# Altium PCB PCB.PcbDoc (part 1 of 2)
Units mil, origin at the board's own origin, x right, y up, seen from the top; angles counter-clockwise.
Board outline 2657.48 x 2755.91 mil, 2 copper layers (Top Layer, Bottom Layer), stack 62.2 mil thick; 84 components, 72 nets, 315 pads, 105 vias.
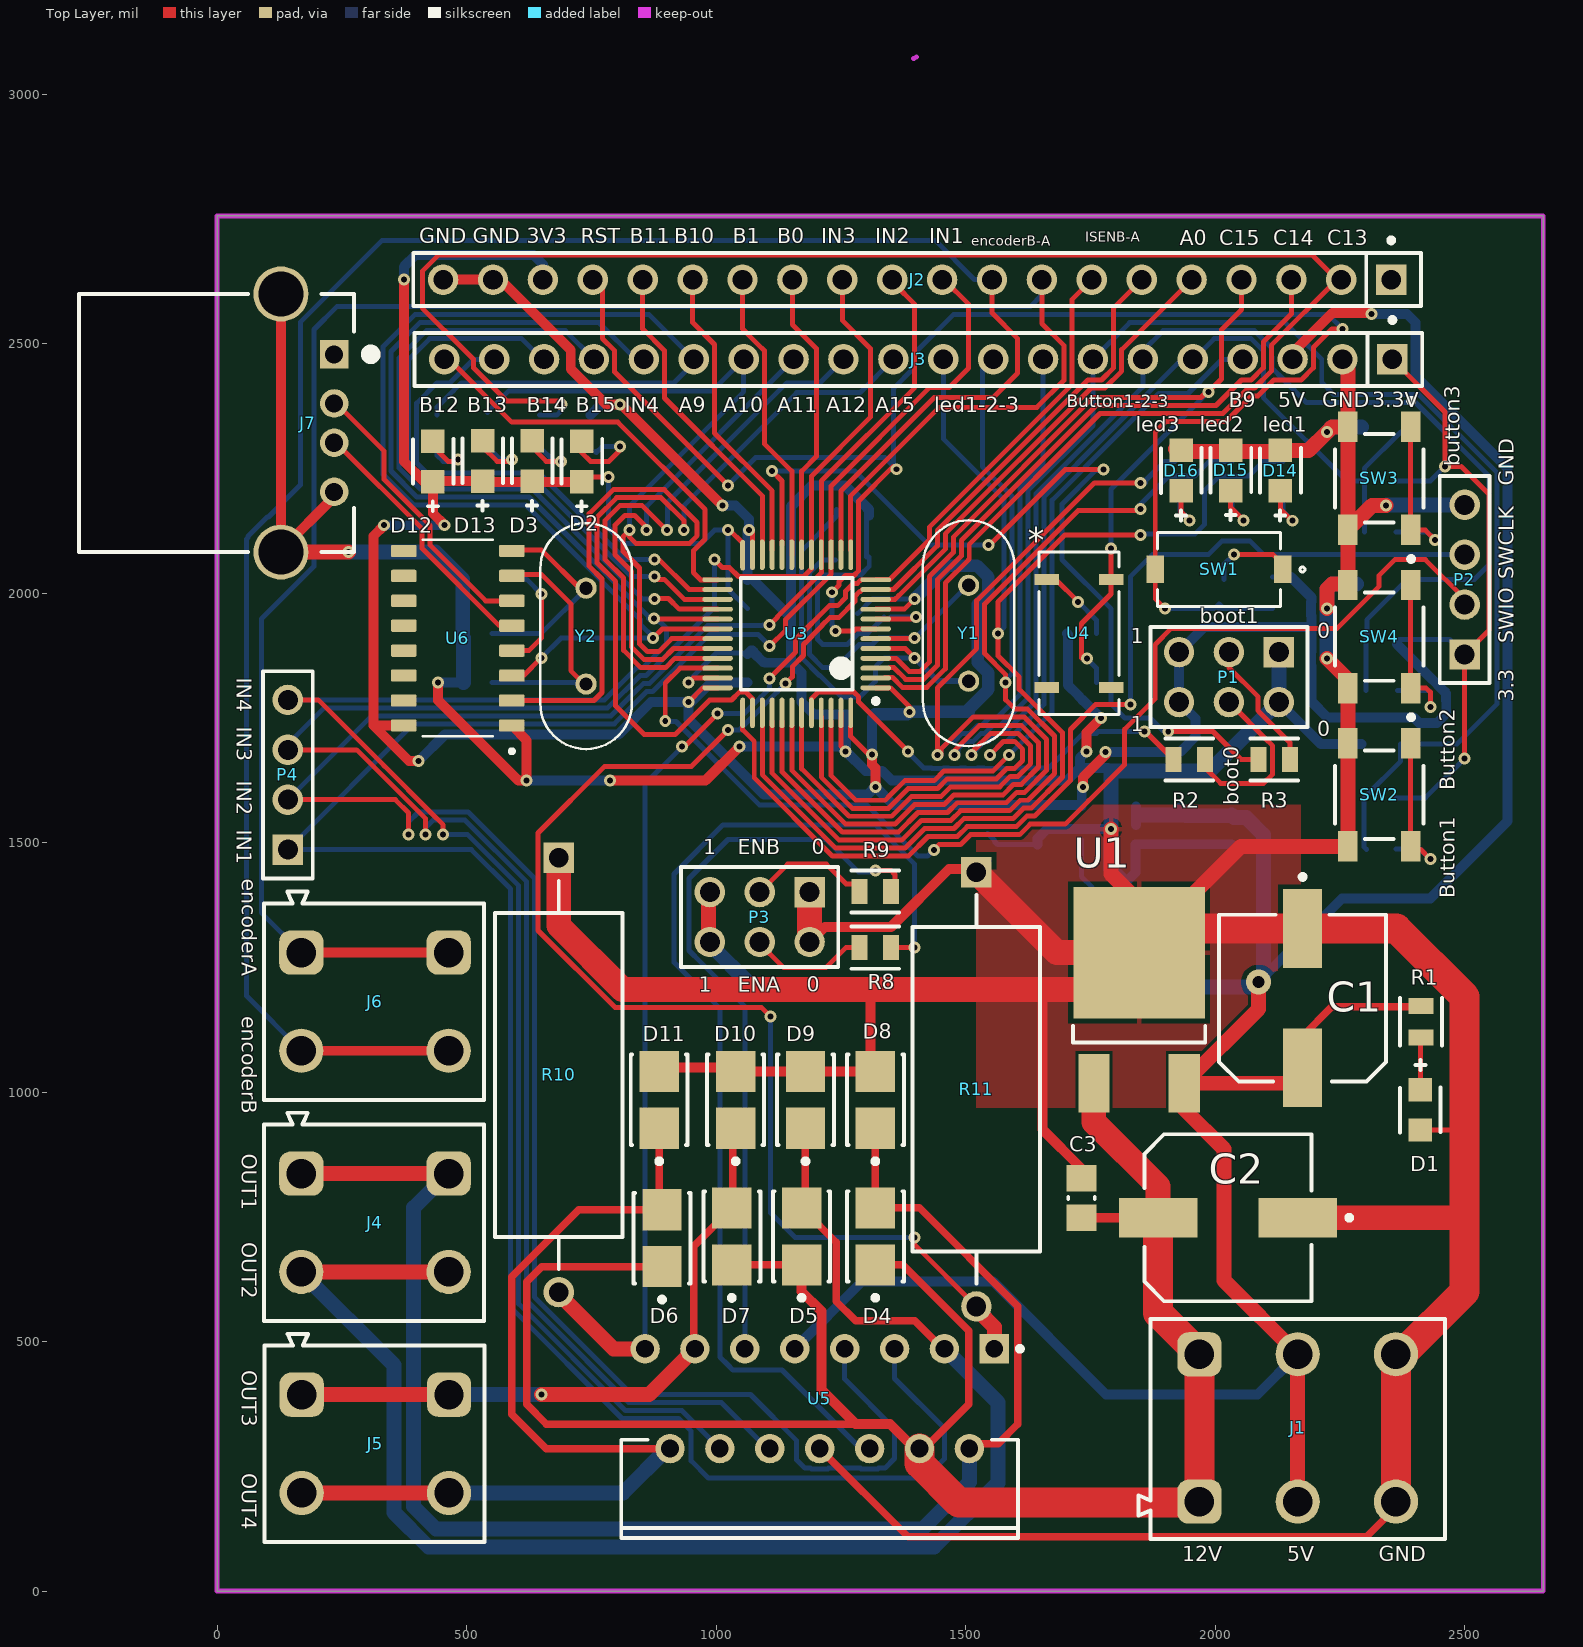
[diagram p0: Top Layer view]
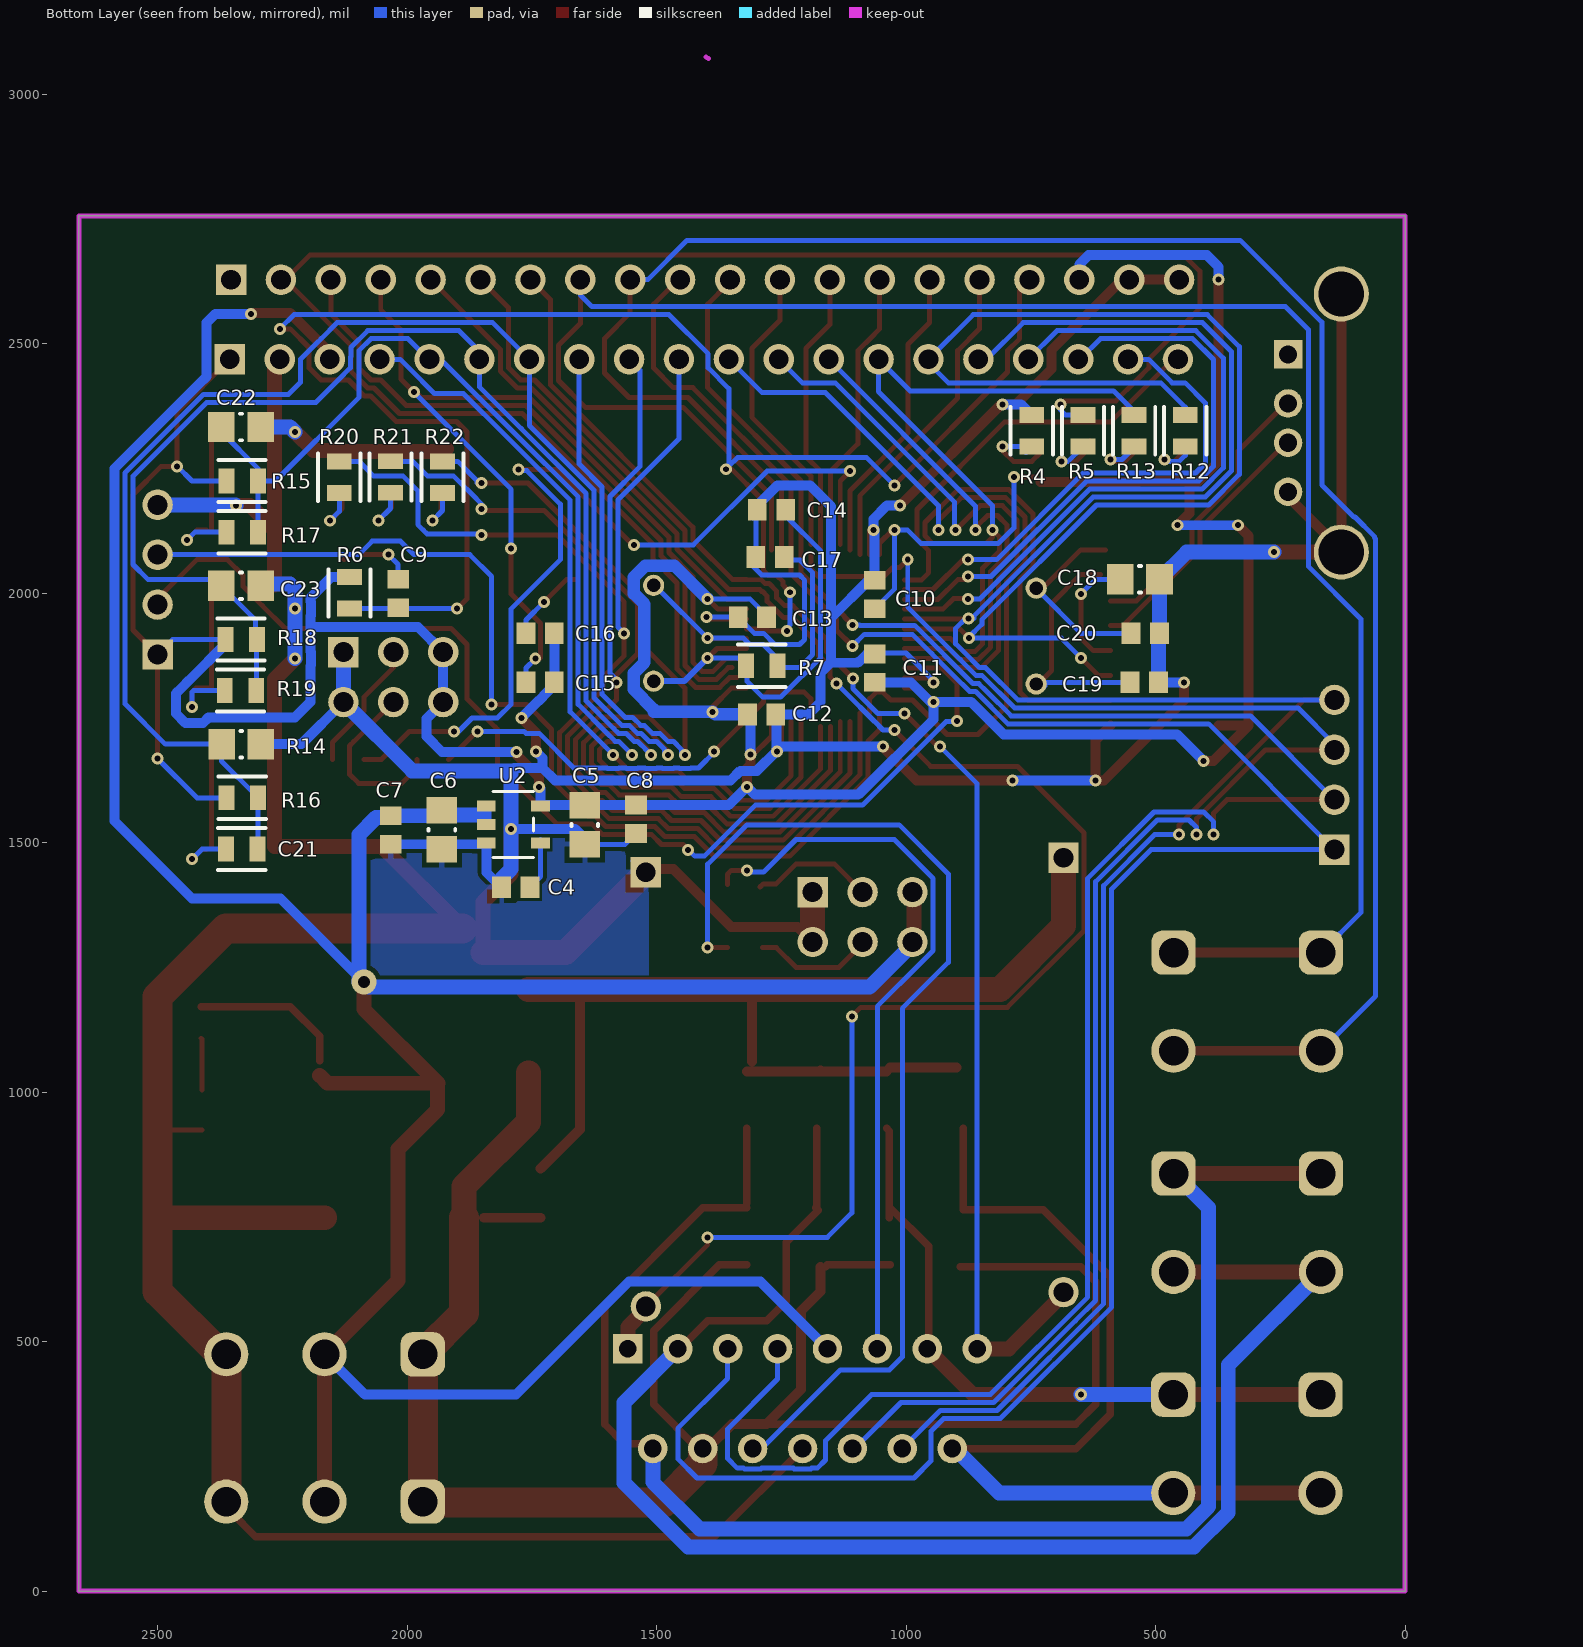
[diagram p1: Bottom Layer view, seen from below]
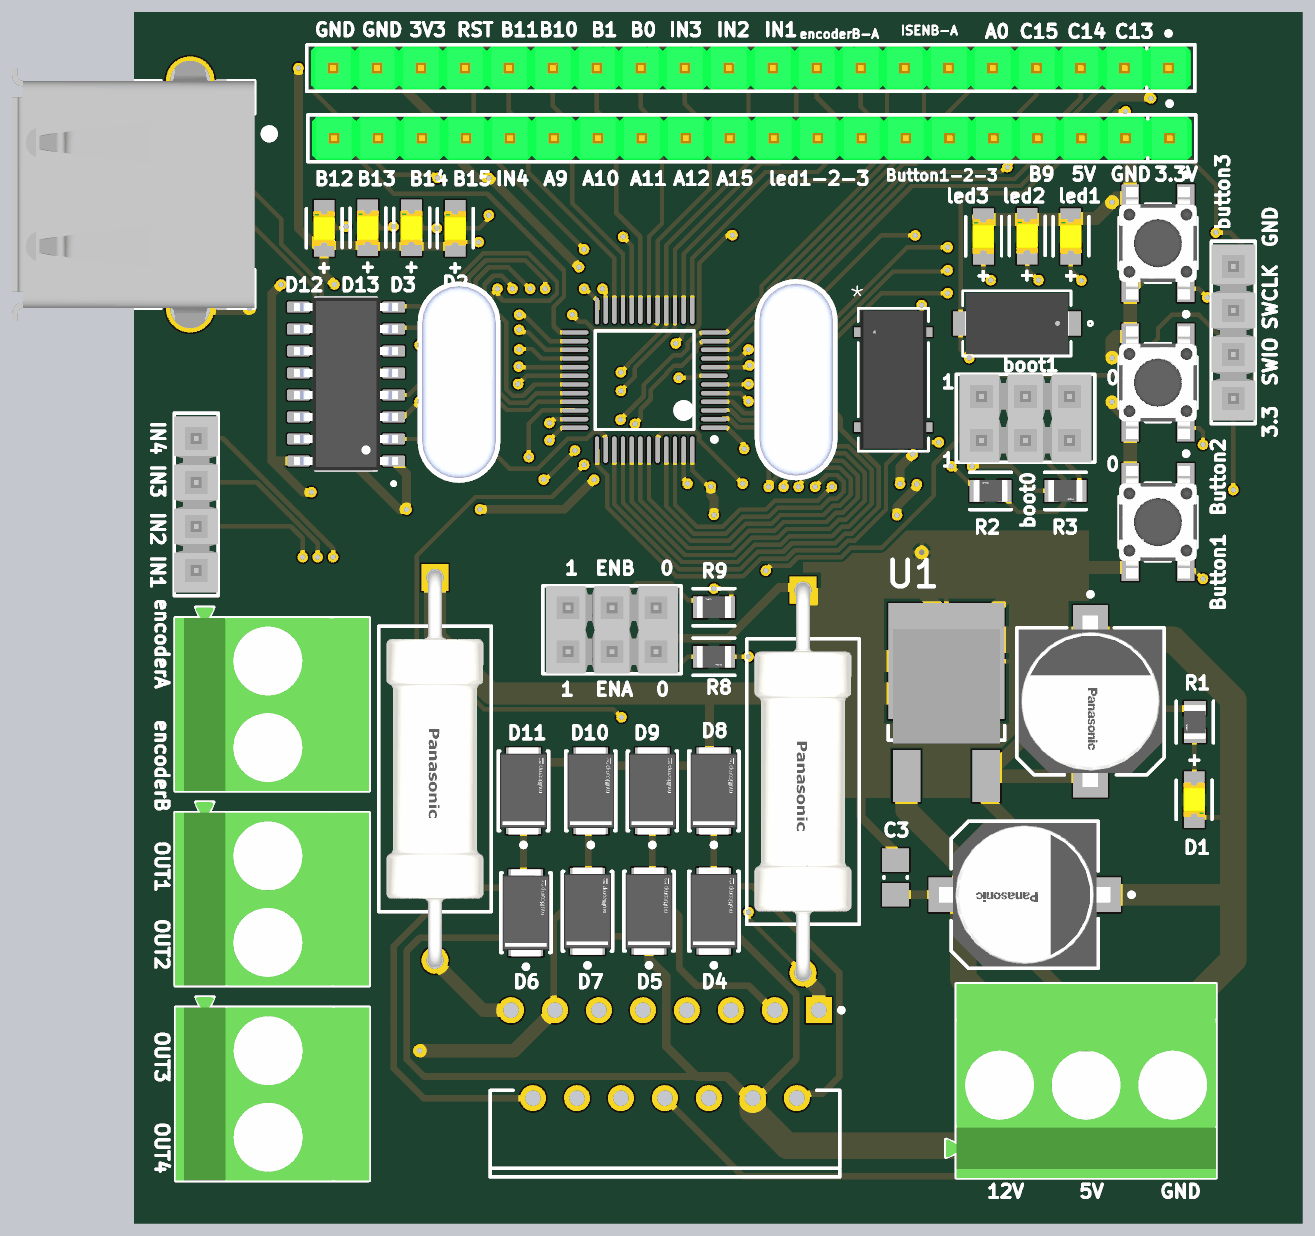
[diagram p3: 3D render of the assembled board from above, using the file's embedded part models]

## Layer stack, top to bottom
Top Solder: solder mask 0.4, Solder Resist, Dk 3.5
Top Layer: signal copper 1.4
Dielectric 1: dielectric 59.4, FR-4, Dk 4.8
Bottom Layer: signal copper 1.4
Bottom Solder: solder mask 0.4, Solder Resist, Dk 3.5

## Board outline
0,0 0,2755.91 2657.48,2755.91 2657.48,0

## Design rules (kind name [scope] priority, off if disabled: settings)
Clearance [All] p1: gap=6 ignorepadtopadclearanceinfootprint=TRUE
MinimumSolderMaskSliver [All] p1: minsoldermaskwidth=6
PolygonConnect [All] p1: connectstyle=Relief reliefconductorwidth=10 reliefentries=4 polygonreliefangle="90 Angle" airgapwidth=10
RoutingVias [All] p1: holewidth=28 width=50 viastyle="Through Hole" minholewidth=12 minwidth=24 maxholewidth=28 maxwidth=50
SolderMaskExpansion [All] p1: expansion=4 istentingtop=FALSE
SupplyNets "Schematic Supply Nets_3" [InNet('12V')] p1: voltage=0.000
SupplyNets "Schematic Supply Nets_2" [InNet('GND')] p2: voltage=0.000
SupplyNets "Schematic Supply Nets_1" [InNet('3.3V')] p3: voltage=0.000
SupplyNets "Schematic Supply Nets" [InNet('5V')] p4: voltage=0.000
UnRoutedNet [All] p1: checkbadconnections=TRUE
Width GND [InNet('GND')] p1: maxlimit=60 minlimit=10 preferedwidth=20
Width 5V [InNet('5V')] p2: maxlimit=30 minlimit=10 preferedwidth=20
Width OUT [InNetClass('OUT')] p3: maxlimit=60 minlimit=10 preferedwidth=30
Width 12V [InNet('12V')] p4: maxlimit=60 minlimit=10 preferedwidth=20
Width All [All] p5: maxlimit=30 minlimit=10 preferedwidth=10 minimp=50.000000 maximp=50.000000 favimp=50.000000
28 further rules are at their usual default settings.

## Classes and differential pairs
component class UART_PC: C18 C19 C20 D12 D13 J7 R12 R13 U6 Y2
component class SYSTEM: 3 C9 C10 C11 C12 C13 C14 C15 C16 C17 D2 D3 J2 J3 P1 P2 R2 R3 R4 R5 R6 R7 SW1 U3 U4 Y1
component class POWER: C1 C2 C3 C4 C5 C6 C7 C8 D1 J1 R1 U1 U2
component class MOTOR_DRIVER_ENCODER: D4 D5 D6 D7 D8 D9 D10 D11 J4 J5 J6 P3 P4 R8 R9 R10 R11 U5
component class "LED & BUTTON": C21 C22 C23 D14 D15 D16 R14 R15 R16 R17 R18 R19 R20 R21 R22 SW2 SW3 SW4

## Components (designator, comment, footprint, x,y, rotation, side; value= is the part's Value field where it differs from the comment)
C1 "220uF 35V 8x10.5mm" FP-FPF-MFG 2175.2,1187.97 r270 top
C2 "220uF 35V 8x10.5mm" FP-FPF-MFG 2025.59,748.03 r180 top
C3 "105 0805" CAPC0805(2012)145_M 1732.13,787.47 r270 top value=15nF
C4 "223 0603" CAPC1608X92X38ML15T08 1782.21,1410.09 r180 bottom locked
C5 "106 0850" CAPC0805(2012)145_M 1643.71,1535.43 r90 bottom locked value=15nF
C6 "105 0805" CAPC0805(2012)145_M 1930.07,1525.51 r90 bottom locked value=15nF
C7 "104 0603" CAPC1608X92X38ML15T08 2032.6,1525.07 r90 bottom locked
C8 "104 0603" CAPC1608X92X38ML15T08 1541.18,1546.71 r90 bottom locked
C9 "105 0603" CAPC1608X92X38ML15T08 2017.72,1999.02 r270 bottom locked
C10 "104 0603" CAPC1608X92X38ML15T08 1062.99,1997.05 r270 bottom locked
C11 "104 0603" CAPC1608X92X38ML15T08 1062.99,1849.41 r270 bottom locked
C12 "104 0603" CAPC1608X92X38ML15T08 1289.38,1756.57 r0 bottom locked
C13 "104 0603" CAPC1608X92X38ML15T08 1308.09,1951.77 r180 bottom locked
C14 "20p 0603" CAPC1608X92X38ML15T08 1269.68,2166.95 r0 bottom locked
C15 "20p 0603" CAPC1608X92X38ML15T08 1733.27,1820.87 r180 bottom locked
C16 "20p 0603" CAPC1608X92X38ML15T08 1733.27,1919.29 r180 bottom locked
C17 "20p 0603" CAPC1608X92X38ML15T08 1272.63,2072.24 r0 bottom locked
C18 "104 0805" CAPC0805(2012)145_M 531.5,2027.56 r180 bottom locked value=15nF
C19 "22 0603" CAPC1608X92X38ML15T08 522.64,1820.87 r180 bottom locked
C20 "22 0603" CAPC1608X92X38ML15T08 520.67,1919.29 r180 bottom locked
C21 "105 0850" CAPC0805(2012)145_M 2332.35,1697.05 r0 bottom locked value=15nF
C22 "105 0850" CAPC0805(2012)145_M 2332.68,2332.68 r0 bottom locked value=15nF
C23 "105 0850" CAPC0805(2012)145_M 2332.74,2014.45 r0 bottom locked value=15nF
D1 "SM0805YCL" FP-SM0805YCL-MFG 2411.38,964.35 r270 top
D2 "SM0805YCL" FP-SM0805YCL-MFG 730.53,2263.46 r90 top
D3 "SM0805YCL" FP-SM0805YCL-MFG 631.16,2264.6 r90 top
D4 "1N4007 SMD" FP-1N4007_SMD-IPC_C 1318.9,710.63 r90 top
D5 "1N4007 SMD" FP-1N4007_SMD-IPC_C 1171.26,710.63 r90 top
D6 "1N4007 SMD" FP-1N4007_SMD-IPC_C 891.4,707.17 r90 top
D7 "1N4007 SMD" FP-1N4007_SMD-IPC_C 1031.34,710.47 r90 top
D8 "1N4007 SMD" FP-1N4007_SMD-IPC_C 1318.9,984.25 r90 top
D9 "1N4007 SMD" FP-1N4007_SMD-IPC_C 1178.98,984.25 r90 top
D10 "1N4007 SMD" FP-1N4007_SMD-IPC_C 1039.06,984.25 r90 top
D11 "1N4007 SMD" FP-1N4007_SMD-IPC_C 885.83,984.25 r90 top
D12 "SM0805YCL" FP-SM0805YCL-MFG 432.42,2263.43 r90 top
D13 "SM0805YCL" FP-SM0805YCL-MFG 531.79,2264.59 r90 top
D14 "SM0805YCL" FP-SM0805YCL-MFG 2130.51,2245.2 r90 top
D15 "SM0805YCL" FP-SM0805YCL-MFG 2031.14,2245.84 r90 top
D16 "SM0805YCL" FP-SM0805YCL-MFG 1931.77,2245.16 r90 top
J1 "691254710003" 691254710003 2165.35,324.8 r0 top
J2 "2-826646-0" FP-2-826646-0-MFG 1402.76,2627.95 r180 top locked
J3 "2-826646-0" FP-2-826646-0-MFG 1405.1,2468.35 r180 top locked
J4 "OUT1_2" 691254710002 314.29,738.02 r270 top
J5 "OUT3_4" 691254710002 314.96,294.94 r270 top
J6 "ENCODER_A_B" 691254710002 314.29,1181.1 r270 top locked
J7 "292303-1" TE-292303-1_V 189.45,2340.58 r270 top locked
P1 "header 3x2 2.54" SMTC-TSW-103-08-X-D 2127.56,1881.5 r180 top locked
P2 "Header 4 2.54mm L" SMTC-TSW-104-08-X-S 2500,1876.77 r90 top locked
P3 "header 3x2 2.54" SMTC-TSW-103-08-X-D 1187.2,1400.65 r180 top locked
P4 "TSW-104-08-G-S" SMTC-TSW-104-08-X-S 141.6,1485.79 r90 top locked
R1 "1K 0.25W/0805" FP-AF0805-IPC_C 2412.56,1140.7 r270 top
R2 "100K 0.25W/0805" FP-AF0805-IPC_C 1948.08,1666.38 r180 top
R3 "100K 0.25W/0805" FP-AF0805-IPC_C 2118.19,1666.38 r0 top
R4 "510R 0.25W/0805" FP-AF0805-IPC_C 748.03,2324.88 r90 bottom locked
R5 "510R 0.25W/0805" FP-AF0805-IPC_C 645.51,2324.88 r90 bottom locked
R6 "10K 0.25W/0805" FP-AF0805-IPC_C 2115.31,2000.19 r270 bottom locked
R7 "1M 0.25W/0805" FP-AF0805-IPC_C 1289.35,1854.17 r180 bottom locked
R8 "100K 0.25W/0805" FP-AF0805-IPC_C 1318.9,1289.37 r0 top
R9 "100K 0.25W/0805" FP-AF0805-IPC_C 1318.9,1401.87 r180 top
R10 "2W/0.2ohm" FP-ERG3S-MFG 684.55,1034.2 r270 top locked
R11 "2W/0.2ohm" FP-ERG3S-MFG 1521.41,1005.47 r270 top locked
R12 "510R 0.25W/0805" FP-AF0805-IPC_C 440.47,2324.88 r90 bottom locked
R13 "510R 0.25W/0805" FP-AF0805-IPC_C 542.99,2324.88 r90 bottom locked
R14 "10K 0.25W/0805" FP-AF0805-IPC_C 2330.12,1589.61 r180 bottom locked
R15 "10K 0.25W/0805" FP-AF0805-IPC_C 2330.63,2224.41 r180 bottom locked
R16 "1K 0.25W/0805" FP-AF0805-IPC_C 2331.3,1487.09 r0 bottom locked
R17 "1K 0.25W/0805" FP-AF0805-IPC_C 2330.63,2121.89 r0 bottom locked
R18 "10K 0.25W/0805" FP-AF0805-IPC_C 2332.67,1907.01 r180 bottom locked
R19 "1K 0.25W/0805" FP-AF0805-IPC_C 2333.72,1804.49 r0 bottom locked
R20 "1K 0.25W/0805" FP-AF0805-IPC_C 2135.83,2232.2 r270 bottom locked
R21 "1K 0.25W/0805" FP-AF0805-IPC_C 2033.31,2232.45 r270 bottom locked
R22 "1K 0.25W/0805" FP-AF0805-IPC_C 1929.13,2232.2 r270 bottom locked
SW1 "PTS636 SM50J SMTR LFS" SW_PTS636_CNK 2007.87,2047.24 r180 top
SW2 "BUTTON TACTILE 4.5 4.5mm" FP-PTS647SK38SMTR2LFS-MFG 2328.74,1595.63 r270 top
SW3 "BUTTON TACTILE 4.5 4.5mm" FP-PTS647SK38SMTR2LFS-MFG 2328.75,2229.8 r270 top
SW4 "BUTTON TACTILE 4.5 4.5mm" FP-PTS647SK38SMTR2LFS-MFG 2328.74,1912.72 r270 top
U1 "L78M05ABDT-TR" FP-L78M05ABDT-TR-MFG 1847.68,1222.01 r0 top
U2 "RT9193-33GB" SOT-23-5_RIT 1786.89,1535.76 r180 bottom locked
U3 "STM32F103C8T6" STM-LQFP48_L 1161.42,1918.31 r180 top
U4 "32.7680K" SOJ_MC-306_EPS 1726.84,1919.29 r0 top
U5 "L298N" STM-FM-15 1207.48,385.43 r270 top
U6 "CH340G" SOIC127P600X180-16N 482.28,1909.45 r180 top
Y1 "8MHZ" XTAL_HC49P488W43L1150T466H350 1505.91,1919.29 r270 top locked
Y2 "12MHZ" XTAL_HC49P488W43L1150T466H350 739.22,1913.7 r270 top locked

## Footprints (in the part's own frame and the unit in brackets; to place one, negate y for a bottom-side part, rotate by r counter-clockwise, add the part's x,y. Pads: shape width x height; smd on the part's side, far side on the other; paste and mask are expansions set on the pad)
691254710002 [mm] "Serie 2547-5.00mm Horizontal Cable Entry with Rising Cage Clamp, 2 pins"
  rrect50% 2.25x2.25 hole 1.5: 1(-2.5,3.8) 1(-2.5,-3.7)
  round 2.25 hole 1.5: 2(2.5,3.8) 2(2.5,-3.7)
  silkscreen extent -5.6,-5.6 5,5.6, body extent -5.6,-5.6 5,5.6, height 18.05
691254710003 [mm] "Serie 2547-5.00mm Horizontal Cable Entry with Rising Cage Clamp, 3 pins"
  rrect50% 2.25x2.25 hole 1.5: 1(-5,-3.7) 1(-5,3.8)
  round 2.25 hole 1.5: 2(0,-3.7) 2(0,3.8) 3(5,-3.7) 3(5,3.8)
  silkscreen extent -8.1,-5.6 7.5,5.6, body extent -8.1,-5.6 7.5,5.6, height 18.05
CAPC0805(2012)145_M [mm] "Chip Capacitor, Body 2.0x1.2mm, Height 1.45mm, IPC Low Density"
  rect 1.35x1.55 smd: 1(-1,0) 2(1,0)
  silkscreen extent -0.05,-0.67 0.05,0.67, body extent -1.1,-0.72 1.1,0.72, height 1.45
CAPC1608X92X38ML15T08 [mm] "Chip Capacitor, 2-Leads, Body 1.60x0.80mm, IPC Low Density"
  rect 0.95x1.1 smd: 1(-0.725,0) 2(0.725,0)
  body extent -0.87,-0.48 0.87,0.47, height 0.92
FP-1N4007_SMD-IPC_C [mm]
  rect 2.1x2 smd paste+0: 1(-1.45,0) 2(1.45,0)
  silkscreen extent -3.25,-1.45 2.3,1.45, body extent -2.6,-1.55 2.6,1.55, height 0.25
FP-2-826646-0-MFG [mm]
  rect 1.55x1.55 hole 1 paste-2539.97: 1(-24.13,0)
  round 1.55 hole 1 paste-2539.97: 2(-21.59,0) 3(-19.05,0) 4(-16.51,0) 5(-13.97,0) 6(-11.43,0) 7(-8.89,0) 8(-6.35,0) 9(-3.81,0) 10(-1.27,0) 11(1.27,0) 12(3.81,0) 13(6.35,0) 14(8.89,0) 15(11.43,0) 16(13.97,0) 17(16.51,0) 18(19.05,0) 19(21.59,0) 20(24.13,0)
  silkscreen extent -25.65,-2.12 25.65,1.35, body extent -25.4,-1.25 25.4,1.25, height 9
FP-AF0805-IPC_C [mil]
  rect 31.82x49.69 smd paste+0: 1(-31.57,0) 2(31.57,0)
  silkscreen extent -47,-42 47,42, body extent -39,-25 39,25, height 24
FP-ERG3S-MFG [mm]
  rect 1.55x1.55 hole 1 paste-2539.97: 1(-11.055,0)
  round 1.55 hole 1 paste-2539.97: 2(11.055,0)
  silkscreen extent -9.88,-3.25 9.88,3.25, body extent -11.93,-3.35 11.93,3.35, height 0.25
FP-FPF-MFG [mm]
  rect 4x2 smd paste+0: 1(-3.55,0) 2(3.55,0)
  silkscreen extent -6.3,-4.25 4.25,4.25, body extent -5.8,-4.5 5.8,4.5, height 0.25
FP-L78M05ABDT-TR-MFG [mm]
  rect 1.6x3 smd paste+0: 1(-2.3,-5.193) 3(2.3,-5.193)
  rect 6.7x6.7 smd paste+0: 4(0,1.458)
  silkscreen extent -3.36,-3.11 3.36,-2.27, body extent -3.46,-6.79 3.46,4.91, height 0.25
FP-PTS647SK38SMTR2LFS-MFG [mm]
  rect 1.55x1 smd paste+0: 1(-2.625,1.6) 2(2.625,1.6) 3(-2.625,-1.6) 4(2.625,-1.6)
  silkscreen extent -4.07,-2.25 2.25,2.25, body extent -3.5,-2.35 3.5,2.35, height 0.25
FP-SM0805YCL-MFG [mil]
  rect 47x47 smd paste+0: 1(-40.5,0) 2(40.5,0)
  silkscreen extent -100,-41 45,40, body extent -40,-25 40,25, height 42
SMTC-TSW-103-08-X-D [mm] ".025 SQ Post Terminal Strip Assembly, 2x3 Pins, Vertical, 2.54mm Pitch, Male"
  rect 1.55x1.55 hole 1.02: 1(0,0)
  round 1.55 hole 1.02: 2(0,2.54) 3(2.54,0) 4(2.54,2.54) 5(5.08,0) 6(5.08,2.54)
  silkscreen extent -1.46,-1.27 6.54,3.81, body extent -1.27,-1.27 6.35,3.81, height 8.38
SMTC-TSW-104-08-X-S [mm] ".025 SQ Post Terminal Strip Assembly, 1x4 Pins, Vertical, 2.54mm Pitch, Male"
  rect 1.55x1.55 hole 1.02: 1(0,0)
  round 1.55 hole 1.02: 2(2.54,0) 3(5.08,0) 4(7.62,0)
  silkscreen extent -1.46,-1.27 9.08,1.27, body extent -1.27,-1.27 8.89,1.27, height 8.38
SOIC127P600X180-16N [mm]
  rrect25% 1.31x0.62 smd: 1(-2.75,4.445) 2(-2.75,3.175) 3(-2.75,1.905) 4(-2.75,0.635) 5(-2.75,-0.635) 6(-2.75,-1.905) 7(-2.75,-3.175) 8(-2.75,-4.445) 9(2.75,-4.445) 10(2.75,-3.175) 11(2.75,-1.905) 12(2.75,-0.635) 13(2.75,0.635) 14(2.75,1.905) 15(2.75,3.175) 16(2.75,4.445)
  silkscreen extent -2.85,-5 1.78,5.85, body extent -3,-5 3,5, height 1.8
SOJ_MC-306_EPS [mil]
  rect 49x22 smd paste+0: 1(-64.5,108.27) 2(-64.5,-108.27) 3(64.5,-108.27) 4(64.5,108.27)
  silkscreen extent -80,-162 80,162, body extent -75,-157 75,157, height 67
SOT-23-5_RIT [mil]
  rect 37.5x22 smd paste+0: 1(-54.25,36.99) 2(-54.25,0) 3(-54.25,-36.99) 4(54.25,-36.99) 5(54.25,36.99)
  silkscreen extent -41,-66 41,66, body extent -59,-61 59,61, height 51
STM-FM-15 [mm] "FM, 15-Leads, Body 20.2x5mm, Pitch 1.27mm"
  rect 1.5x1.5 hole 0.9: 1(-2.54,8.89)
  round 1.5 hole 0.9: 2(2.54,7.62) 3(-2.54,6.35) 4(2.54,5.08) 5(-2.54,3.81) 6(2.54,2.54) 7(-2.54,1.27) 8(2.54,0) 9(-2.54,-1.27) 10(2.54,-2.54) 11(-2.54,-3.81) 12(2.54,-5.08) 13(-2.54,-6.35) 14(2.54,-7.62) 15(-2.54,-8.89)
  silkscreen extent -2.66,-10.1 7.09,10.32, body extent -2.8,-10.1 7.09,10.1, height 21
STM-LQFP48_L [mm] "QFP, 48-Leads, Body 7x7mm, Pitch 0.5mm, IPC High Density"
  oval 1.55x0.25 smd: 1(-4.025,2.75) 2(-4.025,2.25) 3(-4.025,1.75) 4(-4.025,1.25) 5(-4.025,0.75) 6(-4.025,0.25) 7(-4.025,-0.25) 8(-4.025,-0.75) 9(-4.025,-1.25) 10(-4.025,-1.75) 11(-4.025,-2.25) 12(-4.025,-2.75) 25(4.025,-2.75) 26(4.025,-2.25) 27(4.025,-1.75) 28(4.025,-1.25) 29(4.025,-0.75) 30(4.025,-0.25) 31(4.025,0.25) 32(4.025,0.75) 33(4.025,1.25) 34(4.025,1.75) 35(4.025,2.25) 36(4.025,2.75)
  oval 0.25x1.55 smd: 13(-2.75,-4.025) 14(-2.25,-4.025) 15(-1.75,-4.025) 16(-1.25,-4.025) 17(-0.75,-4.025) 18(-0.25,-4.025) 19(0.25,-4.025) 20(0.75,-4.025) 21(1.25,-4.025) 22(1.75,-4.025) 23(2.25,-4.025) 24(2.75,-4) 37(2.75,4.025) 38(2.25,4.025) 39(1.75,4.025) 40(1.25,4.025) 41(0.75,4.025) 42(0.25,4.025) 43(-0.25,4.025) 44(-0.75,4.025) 45(-1.25,4.025) 46(-1.75,4.025) 47(-2.25,4.025) 48(-2.75,4.025)
  silkscreen extent -4.15,-2.85 2.85,3.55, body extent -3.75,-3.25 3.25,3.75, height 1.6
SW_PTS636_CNK [mil]
  rect 35x55 smd paste+0: 1(-127.95,0) 2(127.95,0)
  silkscreen extent -172,-74 123,74, body extent -118,-69 118,69, height 169
TE-292303-1_V [mm] "THD, 4-Leads, Body 13.13x14mm, Pitch 2.5mm"
  rect 1.45x1.45 hole 0.92: 1(-3.5,1.144)
  round 1.45 hole 0.92: 2(-1,1.144) 3(1,1.144) 4(3.5,1.144)
  round 2.8 hole 2.3: 5(-6.57,-1.566) 6(6.57,-1.566)
  silkscreen extent -6.57,-11.85 6.57,3.25, body extent -8.12,-11.85 8.12,2.15, height 7.72
XTAL_HC49P488W43L1150T466H350 [mm]
  round 1.08 hole 0.68: 1(-2.44,0) 2(2.44,0)
  silkscreen extent -5.75,-2.33 5.75,2.33, body extent -5.75,-2.33 5.75,2.33, height 3.5

## Part data
C1 C2: library part CMP-2000-06215-2, "CAP ALUM 220UF 20% 35V SMD", Capacitance=220uF, Case/Package=Radial, ESR (Equivalent Series Resistance)=80mR, Leakage Current=77uA, Max Operating Temperature=105°C, Min Operating Temperature=-55°C, Package Quantity=500, Ripple Current=850mA, Tolerance=20%, Voltage=35V, Construction=Cylindrical, Contact Plating=Tin, Diameter=8mm, Height=10.2mm, Height - Seated (Max)=0.402inch, Lead Free="Lead Free", Lead Pitch=3.1mm, Length=10.5mm, Life (Hours)=2000Hour, Material=Aluminium, Mount="Surface Mount", Number of Pins=2, Packaging="Tape and Reel", Polarity=Polar, Radiation Hardening=No, REACH SVHC="No SVHC", Ripple Current (AC)=850mA, RoHS Compliant=Yes, Series=FP, Termination=SMD/SMT, Voltage Rating=35V, Voltage Rating (DC)=35V, Width=8.3mm
C3 C5 C6 C18 C21 C22 C23: library part CMP-1036-03968-1, "CAP 15nF 100V ±10% 0805 (2012 Metric) Thickness 1.45mm SMD", Case-EIA=0805, Case-Metric=2012, Rated Voltage="100 V", Tolerance=Â±10%, Max Thickness="1.45 mm", Technology=SMT
C4 C7 C8 C9 C10 C11 C12 C13 C14 C15 C16 C17 C19 C20: library part CMP-2006-01201-1, Manufacturer=Vitramon, Part Number=VJ0603Y103JXXAC
D1 D2 D3 D12 D13 D14 D15 D16: library part CMP-35283-000007-1, "LED YELLOW CLEAR 0805 SMD", Case Code (Imperial)=0805, Case Code (Metric)=2012, Color=Yellow, Forward Current=2mA, Forward Voltage=1.9V, Lens Color=Colorless, Max Operating Temperature=80°C, Min Operating Temperature=-30°C, Package Quantity=4000, Case/Package=0805, Dominant Wavelength=592nm, Height=0.8mm, Illumination Color=Yellow, Lead Free="Lead Free", Length=2mm, Lens Transparency=Clear, Luminous Intensity=11.5mcd, Mount="Surface Mount", Packaging="Tape and Reel", Test Current=2mA, Viewing Angle=130°, Width=1.2mm
D4 D5 D6 D7 D8 D9 D10 D11: library part CMP-12389-000001-1, "Rectifier, 1Kv, 1A, Do-214Ac Rohs Compliant: Yes"
J1: library part CMP-1502-02592-2, NexarPartId=105950850
J2 J3: library part CMP-03369-000139-1, "CONN HEADER VERT 20POS 2.54MM", Color=Green, Current Rating=3A, Flammability Rating="UL94 V-0", High Temperature Housing=No, Max Operating Temperature=105°C, Min Operating Temperature=-65°C, Package Quantity=300, Board Standoff="No (Without)", Connector Type=Plug, Contact Gender=Male, Contact Material=Bronze, Contact Mating Length=5.8mm, Contact Plating=Gold, Contact Post Length=0.1259inch, Contact Protection="No (Without)", Contact Shape=Square, Contact Type="Male Pin", Depth=2.5mm, ELV=Compliant, Gasket="No (Without)", High Speed Serial Data Connector=No, Housing Color=Green, Housing Material=PBT, Keyed=No, Length=50.8mm, Mating Alignment="No (Without)", Mating Connector Lock="No (Without)", Mount="Straddle Mount", Number of Contacts=20, Number of Positions=20, Number of Rows=1, Orientation=Straight, Packaging=Carton, PCB Mount Retention=Without, PCB Mounting Orientation=Vertical, Pitch=2.54mm, Plating Thickness=0.8um, Radiation Hardening=No, RoHS Compliant=Yes, Row Spacing=2.54mm, Selectively Loaded="No (Without)", Series="AMPMODU MOD II", Stabilizers="No (Without)", Strain Relief="No (Without)", Termination="Through Hole"
J4 J5 J6: library part CMP-1502-02591-2, NexarPartId=105950848
J7: library part CMP-2000-05404-1, "1 Port Right Angle Through Hole Mount Female Type A USB Connector, 4 Position, -55 to 85 degC, RoHS, Tube", Manufacturer="TE Connectivity", Package Description="4-Pin Through Hole Device, Body 14 x 13.13 mm, Pitch 2.5 mm", Connector Mounting=PCB, Connector Type=USBA, Contact Material=Copper, Contact Plating=Gold, Contact Termination Type=Solder, Datasheet URL=http://www.farnell.com/cad/1653030.pdf, Datasheet Version=Feb-12, Gender=Receptacle, Manufacturer URL=http://www.te.com/, No. of Contacts=4, Package Reference=292303-1, SVHC=NoSVHC(16-Jun-2014)
P1 P3: library part CMP-1024-00337-1, "0.025\" SQ Post Header, Through-hole, Vertical, -55 to 125 degC, 2.54 mm Pitch, 6-Pin, Male, RoHS", Manufacturer=Samtec, PartNumber=TSW-103-08-F-D, Temperature Range="-55 to 125 degC", ComponentLink1Description="Manufacturer URL", ComponentLink1URL=http://www.samtec.com, ComponentLink2Description=Datasheet, ComponentLink2URL=http://www.samtec.com/documents/webfiles/pdf/TSW_TH.PDF, ComponentLink3Description="Package Specification", ComponentLink3URL=http://www.samtec.com/documents/webfiles/cpdf/TSW-XXX-XX-XXX-X-XX-XXX-MKT.pdf, DatasheetVersion=F-214, Mounting Technology=Through-hole, Orientation=Vertical, PackageDescription=".025[0.64] SQ. Post Terminal Strip Assembly", PackageReference=TSW-103-08-X-D, PackageVersion="DM, 8/1988", Pitch="2.54 mm", RoHS=True
P2: library part CMP-1024-00357-1, "0.025\" SQ Post Header, Through-hole, Vertical, -55 to 125 degC, 2.54 mm Pitch, 4-Pin, Male, RoHS", Manufacturer=Samtec, PartNumber=TSW-104-08-G-S, Temperature Range="-55 to 125 degC", ComponentLink1Description="Manufacturer URL", ComponentLink1URL=http://www.samtec.com, ComponentLink2Description=Datasheet, ComponentLink2URL=http://www.samtec.com/documents/webfiles/pdf/TSW_TH.PDF, ComponentLink3Description="Package Specification", ComponentLink3URL=http://www.samtec.com/documents/webfiles/cpdf/TSW-XXX-XX-XXX-X-XX-XXX-MKT.pdf, DatasheetVersion=F-214, Mounting Technology=Through-hole, Orientation=Vertical, PackageDescription=".025[0.64] SQ. Post Terminal Strip Assembly", PackageReference=TSW-104-08-X-S, PackageVersion="DM, 8/1988", Pitch="2.54 mm", RoHS=True
P4: library part CMP-1024-00357-1, "0.025\" SQ Post Header, Through-hole, Vertical, -55 to 125 degC, 2.54 mm Pitch, 4-Pin, Male, RoHS", Manufacturer=Samtec, Temperature Range="-55 to 125 degC", ComponentLink1Description="Manufacturer URL", ComponentLink1URL=http://www.samtec.com, ComponentLink2Description=Datasheet, ComponentLink2URL=http://www.samtec.com/documents/webfiles/pdf/TSW_TH.PDF, ComponentLink3Description="Package Specification", ComponentLink3URL=http://www.samtec.com/documents/webfiles/cpdf/TSW-XXX-XX-XXX-X-XX-XXX-MKT.pdf, DatasheetVersion=F-214, Mounting Technology=Through-hole, Orientation=Vertical, PackageDescription=".025[0.64] SQ. Post Terminal Strip Assembly", PackageReference=TSW-104-08-X-S, PackageVersion="DM, 8/1988", PartNumber=TSW-104-08-G-S, Pitch="2.54 mm", RoHS=True
R1 R2 R3 R4 R5 R6 R7 R8 R9 R12 R13 R14 R15 R16 R17 R18 R19 R20 R21 R22: library part CMP-03412-045285-1, "Anti-Sulfurated Chip Resistor Automotive Grade 75Ω 1% 0.125W ±100ppm/°C 0805", Case/Package=0805, Max Operating Temperature=155°C, Max Power Dissipation=125mW, Min Operating Temperature=-55°C, Resistance=75R, Resistor Type="Thick Film", Temperature Coefficient=100ppm/°C, Tolerance=1%, Features="Moisture Resistant", Height=0.024inch, Length=0.079inch, Number of Terminations=2, Packaging="Tape and Reel", RoHS Compliant=Yes, Series=AF, Width=0.049inch
R10 R11: library part CMP-00287-55648916-1, "ERG-3SJ361A Res Metal Oxide Film 360 Ohm 5% 3W ±300ppm/C Conformal Coated AXL", Case/Package=Axial, Max Operating Temperature=200°C, Max Power Dissipation=3W, Min Operating Temperature=-55°C, Resistance=360Ω, Temperature Coefficient=300ppm/°C, Tolerance=5%, Voltage Rating=700V, Voltage Rating (DC)=350V, Composition="Metal Oxide", Contact Plating=Tin, Diameter=5.5mm, Lead Diameter=800µm, Length=15mm, Mount="Through Hole", NexarPartId=55648916, Number of Terminations=2, Power Rating=3W, Radiation Hardening=No, RoHS=Compliant, Schedule B="8533210090, 8533210090", Termination=Axial, Weight=1.470008g
SW1: "No Description Available", Manufacturer_Name="C&K Components", Copyright="Copyright (C) 2025 Ultra Librarian. All rights reserved.", Manufacturer_Part_Number="PTS636 SM50J SMTR LFS", Type="Tactile Switches"
SW2 SW3 SW4: library part CMP-10040-000033-1, "TACT 4.5 X 4.5, 3.8 MM H, 2.5N,", Max Operating Temperature=70°C, Min Operating Temperature=-20°C, Operating Force=250gf, Ratings=IP40, Actuator Type=Standard, Illumination Type=Non-Illuminated, Mechanical Life=100000Cycles, Mount="Surface Mount", Packaging="Tape and Reel", Switch Function=Off-Mom, Switch Travel=0.25mm, Termination="Gull Wing", Throw Configuration=SPST
U1: library part CMP-0244-00177-2, "IC REG LINEAR 5V 500MA DPAK", Case/Package=TO-252, Dropout Voltage=2V, Max Input Voltage=35V, Max Operating Temperature=125°C, Max Output Current=500mA, Min Input Voltage=10V, Min Operating Temperature=-40°C, Min Output Voltage=5V, Output Voltage Accuracy=2%, Package Quantity=1, Power Supply Rejection Ratio (PSRR)=62dB, Quiescent Current=6mA, Tolerance=4%, Accuracy=2%, Contact Plating=Tin, Height=2.4mm, Lead Free="Lead Free", Length=6.6mm, Mount="Surface Mount", Nominal Output Voltage=5V, Number of Outputs=1, Number of Pins=3, Number of Regulators=1, Output Current=500mA, Output Type=Fixed, Output Voltage=5V, Packaging="Tape and Reel", Polarity=Positive, Radiation Hardening=No, REACH SVHC="No SVHC", Weight=0.01lb, Width=6.2mm
U2: "No Description Available", Manufacturer_Name="Richtek Technology", Copyright="Copyright (C) 2025 Ultra Librarian. All rights reserved.", Manufacturer_Part_Number=RT9193-33GB, RefDes=RefDes, Type=Type
U3: library part CMP-0237-00215-3, "ARM Cortex-M3 32-bit MCU, 64 KB Flash, 20 KB Internal RAM, 37 I/Os, 48-pin LQFP, -40 to 85 degC, Tray", I/Os (High Current)=37, Operating Frequency(F) (Processor speed) (MHz)=72, Supply Voltage(Vcc) min (V)=2, A/D Converter="2x12-bit (10 Channel)", ComponentLink1Description="Manufacturer URL", ComponentLink1URL=http://www.st.com/web/en/home.html, ComponentLink2Description=Datasheet, ComponentLink2URL=http://www.st.com/st-web-ui/static/active/en/resource/technical/document/datasheet/CD00161566.pdf, ComponentLink3Description="Package Specification", ComponentLink3URL=http://www.st.com/st-web-ui/static/active/en/resource/technical/document/datasheet/DM00058181.pdf, Core="ARM Cortex-M3", DatasheetVersion="Rev. 16", FLASH Size (Prog) (kB)=64, Internal RAM Size (kB)=20, Mounting Technology="Surface Mount", PackageDescription="48-Pin Low Profile Quad Flat Package, 7 x 7 mm Body, 0.5 mm Pitch", PackageReference=LQFP48, PackageVersion="Rev. 6, 06/2013", Packing=Tray, PartNumber=STM32F103C8T6
U4: library part "MC-306 32.7680K-A3: ROHS", "No Description Available", Manufacturer_Name=Epson, Copyright="Copyright (C) 2025 Ultra Librarian. All rights reserved.", Manufacturer_Part_Number="MC-306 32.7680K-A3: ROHS", RefDes=RefDes, Type=Type
U5: library part CMP-2000-06526-1, "Dual Full-Bridge Driver, 4.8 to 46 V, -40 to 150 degC, 15-Pin FM (MW 15L), RoHS, Tube", Driver Case Style=Multiwatt, Manufacturer=STMicroelectronics, Operating Temperature Max=130°C, Operating Temperature Min=-25°C, Output Current=2A, Output Voltage=46V, Package Description="15-Pin Flange Mount, Body 5 x 19.6 mm, Pitch 1.27 mm", Package Reference=FM-15, PartNumber=L298, Supply Voltage Max=7V, Supply Voltage Min=4.5V, Automotive Qualification Standard=-, Datasheet URL=https://datasheet.ciiva.com/15109/getdatasheetpartid-50682-15109332.pdf, Datasheet Version=01/2000, Manufacturer URL=http://www.st.com/, Motor Type=FullBridge, Mounting Technology=ThroughHole, MSL=-, No. of Outputs=4Outputs, No. of Pins=15Pins, Packaging=Each, Product Range=-, SVHC=NoSVHC(17-Dec-2015)
U6: "USB Interface Integrated Circuit", Package=None, Availability="Not in stock", Check_prices=https://www.snapeda.com/parts/Ch340G/WCH/view-part/?ref=eda, MF=WCH, MP=Ch340G, Price=None, SnapEDA_Link=https://www.snapeda.com/parts/Ch340G/WCH/view-part/?ref=snap
Y1 Y2: library part HC-49/U-S16000000ABJB, "16 MHz Â±30ppm Crystal 18pF 50 Ohms HC-49/US", Package="HC-49/US Citizen Finetech Miyota", Check_prices=https://www.snapeda.com/parts/HC-49/U-S16000000ABJB/Citizen/view-part/?ref=eda, MF="Citizen Finedevice", MP=HC-49/U-S16000000ABJB, SnapEDA_Link=https://www.snapeda.com/parts/HC-49/U-S16000000ABJB/Citizen/view-part/?ref=snap

## Via types
v1: diameter 24, hole 12, Top Layer to Bottom Layer, 104 vias
v2: diameter 50, hole 24, Top Layer to Bottom Layer, 1 vias

## Nets (pads, with @x,y where several pads share a name; then routed paths per layer and width w, separated by ;. In a path a pad name is that pad's centre, name@x,y a point inside that pad or via, vN(x,y) a via of type N, cw(c..) or ccw(c..) an arc to the next point about the centre after c; other vN are vias at no path point)
3.3V: C5.2 C8.2 C10.2 C11.2 C12.2 C13.2 D2.1 D3.1 D12.1 D13.1 J2.18 J3.1 P1.5 P1.6 P2.1 R6.1 R14.1 R15.1 R18.1 U2.5 U3.1 U3.9 U3.24 U3.36 U3.48 U6.16 | length 8385.3
  Top Layer w10: D2.1@730.53,2222.96 739.97,2232.4 v1(784.15,2232.4) ; v1(944.88,1781.5) 973.43,1810.04 U3.36@1002.95,1810.04 ; v1(1023.62,2125.98) 1027.34,2125.98 1053.15,2100.17 U3.24@1053.15,2076.77 ; U3.48@1269.68,1732.28 1269.68,1712.6 1309.06,1673.23 v1(1312,1676.17) ; U3.1@1319.88,1810.04 1349.41,1810.04 1387.8,1771.65 v1(1387.8,1761.81) ; U3.9@1319.88,1967.52 1376.97,1967.52 v1(1397.64,1988.19) ; J3.1@2355.1,2468.35 2460.63,2362.81 v1(2460.63,2253.94) 2492.72,2253.94 2549.21,2197.44 2549.21,1925.98 P2.1@2500,1876.77 v1(2500,1668.46)
  Top Layer w20: v1(334.65,2135.83) 313.29,2114.47 313.29,1734.45 ; U6.16@374.02,1734.45 313.29,1734.45 ; v1(374.02,2627.95) 374.14,2627.83 374.14,2263.65 414.87,2222.93 D12.1@432.42,2222.93 ; v1(403.54,1663.39) 384.35,1663.39 313.29,1734.45 ; v1(455.92,2135.83) 432.42,2159.33 D12.1@432.42,2222.93 ; D13.1@531.5,2224.41 532.95,2222.96 631.16,2222.96 D2.1@730.53,2222.96 ; D13.1@531.79,2224.41 433.91,2224.41 D12.1@432.42,2222.93 ; v1(1312,1676.17) 1312,1656.49 1318.9,1649.59 v1(1318.9,1611.7) ; v1(1735.41,1610.96) 1735.41,1630.59 1780.51,1675.7 v1(1780.51,1681.49)
  Bottom Layer w10: v1(784.15,2232.4) 784.15,2130.42 815.59,2098.98 871.96,2098.98 923.86,2098.98 969.62,2098.98 996.62,2125.98 v1(1023.62,2125.98) 1023.62,2007.87 C10.2@1062.99,1968.5 ; C13.2@1283.48,1958.66 1313.01,1988.19 v1(1397.64,1988.19) ; R6.1@2115.31,2031.76 2140.16,2031.76 ; R14.1@2361.69,1589.61 2421.14,1589.61 v1(2500,1668.46) ; R15.1@2362.2,2224.41 2431.1,2224.41 v1(2460.63,2253.94) ; R18.1@2364.24,1907.01 2469.76,1907.01 P2.1@2500,1876.77
  Bottom Layer w20: v1(334.65,2135.83) v1(455.92,2135.83) ; v1(374.02,2627.95) 374.02,2653.8 397.39,2677.17 634.06,2677.17 652.76,2658.46 J2.18@652.76,2627.95 ; v1(403.54,1663.39) 456.94,1716.79 696.86,1716.79 697.28,1716.37 781.16,1716.37 781.58,1716.79 804.65,1716.79 869.36,1781.5 922.7,1781.5 v1(944.88,1781.5) ; C11.2@1062.99,1820.87 990.14,1820.87 976.88,1807.61 950.77,1781.5 v1(944.88,1781.5) ; v1(1312,1676.17) 1312,1750.64 C12.2@1317.93,1756.57 ; C8.2@1541.18,1575.25 1355.34,1575.25 v1(1318.9,1611.7) 1303,1595.8 1095.9,1595.8 944.88,1746.82 v1(944.88,1781.5) ; C8.2@1545.28,1574.8 C5.2@1643.71,1574.8 1730.58,1574.8 U2.5@1732.64,1572.74 1732.64,1608.19 v1(1735.41,1610.96) ; v1(1780.51,1681.49) 1929.91,1681.49 1960.58,1712.16 1960.58,1748.47 P1.6@1927.56,1781.5 1927.56,1868.5 P1.5@1929.13,1870.08 ; P1.5@1927.56,1881.5 1977.92,1931.85 2193.41,1931.85 ; 2140.16,2031.76 2152.29,2031.76 2193.41,1990.65 2193.41,1982.87 2192.41,1981.87 2192.41,1955.36 2193.41,1954.36 2193.41,1931.85 ; R18.1@2364.24,1897.47 2436.22,1825.49 2436.49,1825.49 2452.1,1809.88 2462.99,1798.99 2462.99,1785.02 2463.1,1784.91 2463.1,1758.4 2444.36,1739.65 2408.83,1739.65 2397.5,1750.98 2224.41,1750.98 2193.41,1781.98 2193.41,1854.25 2192.41,1855.25 2192.41,1881.76 2193.41,1882.76 2193.41,1931.85
  Bottom Layer w25: C12.2@1317.93,1756.57 1382.56,1756.57 v1(1387.8,1761.81) 1505.91,1761.81 1505.91,1767 1545.67,1806.76 1545.67,1839.7 1524.5,1860.87 1524.5,1977.72 1545.67,1998.89 1545.67,2031.82 1522.37,2055.11 1464.56,2055.11 v1(1397.64,1988.19)
5V: C1.2 C6.2 C7.2 J1.2 J3.3 P3.5 P3.6 R1.1 U1.3 U2.1 U2.2 U5.9 | length 6893.4
  Top Layer w15: J1.2@2165.35,167.32 J1.2@2165.35,179.13 ; C1.2@2175.2,1062.99 2175.2,1112.2 2233.89,1170.9 R1.1@2412.56,1170.9
  Top Layer w20: J3.3@2155.1,2468.35 2155.1,2481.67 2234.95,2561.53 2268.35,2561.53 2310.52,2561.53 v1(2312.99,2559.06)
  Top Layer w30: P3.6@984.25,1300.9 P3.5@984.25,1399.32 ; U1.3@1938.98,1013.78 1938.98,964.57 2017.72,885.83 2017.72,622.05 J1.2@2165.35,474.41 ; v2(2086.61,1220.47) 2086.61,1165.96 U1.3@1938.23,1017.58 2159.31,1017.58 C1.2@2175.2,1033.46 ; J1.2@2165.35,179.13 J1.2@2165.35,472.44
  Bottom Layer w15: 1858.77,1555.12 1920.31,1555.12 C6.2@1930.07,1564.88
  Bottom Layer w20: U5.9@1157.48,485.43 1292.13,620.08 1486.22,620.08 1555.12,620.08 1781.5,393.7 2084.65,393.7 J1.2@2165.35,474.41 ; U2.2@1841.14,1535.43 U2.1@1841.14,1572.42 ; v2(2086.61,1220.47) 2253.94,1387.8 2431.1,1387.8 2586.21,1542.91 2586.21,2041.76 2586.21,2249.58 2416.9,2418.89 2401.61,2434.18 2401.61,2541.86 2384.41,2559.06 v1(2312.99,2559.06)
  Bottom Layer w30: P3.5@977.42,1400.65 P3.5@987.2,1400.65 ; P3.6@984.25,1299.21 1072.83,1210.63 2076.77,1210.63 v2(2086.61,1220.47) 2096.46,1220.47 2096.46,1515.75 2062.29,1549.91 2037.81,1549.91 C7.2@2032.6,1555.12 ; 1850.39,1555.12 C6.2@1930.07,1555.12 ; C6.2@1930.07,1564.88 1941.33,1553.62 C7.2@2032.6,1553.62
12V: C2.2 C3.2 D4.1 D5.1 D6.1 D7.1 J1.1 U1.1 U5.4 | length 4285.9
  Top Layer w15: D6.1@891.4,650.08 650.08,650.08 620.08,620.08 620.08,374.02 659.45,334.65 1279.53,334.65 ; D7.1@1031.34,653.38 1157.64,653.38 D5.1@1161.42,649.61 ; D4.1@1318.9,653.54 1374.02,653.54 1505.91,521.65 1505.91,374.02 U5.4@1417.32,285.43 ; 1732.28,196.85 1948.82,196.85 J1.1@1968.5,177.17
  Top Layer w20: D5.1@1171.26,649.61 1171.26,600.39 1210.63,561.02 1210.63,403.54 1279.53,334.65 1348.43,334.65 1397.64,285.43 U5.4@1407.48,285.43 ; C3.2@1732.19,748.03 C2.2@1845.39,748.03
  Top Layer w50: U1.1@1756.67,1038.61 1756.67,940.19 1885.83,811.02 C2.2@1885.83,748.03
  Top Layer w60: U5.4@1407.48,285.43 1407.48,255.91 1486.22,177.17 J1.1@1968.5,177.17 ; C2.2@1885.83,748.03 1885.83,557.09 J1.1@1968.5,474.41 ; J1.1@1968.5,179.13 J1.1@1968.5,472.44
BOOT0: R2.2 U3.44 | length 889.1
  Top Layer w10: U3.44@1190.94,1759.84 1190.94,1788.26 1204.04,1801.35 1265.95,1801.35 1276.28,1801.35 1285.61,1792.03 1285.61,1781.7 v1(1384.58,1682.72) ; v1(1858.77,1722.44) 1860.44,1722.44 R2.2@1916.51,1666.38
  Bottom Layer w10: v1(1384.58,1682.72) 1382.56,1682.72 1415.79,1649.49 1431.3,1649.49 1432.09,1648.7 1454.46,1648.7 1455.25,1649.49 1465.3,1649.49 1466.09,1648.7 1488.46,1648.7 1489.25,1649.49 1499.3,1649.49 1500.09,1648.7 1522.46,1648.7 1523.25,1649.49 1536.96,1649.49 1537.75,1648.7 1560.12,1648.7 1560.91,1649.49 1575.14,1649.49 1575.93,1648.7 1598.3,1648.7 1599.09,1649.49 1666.2,1649.49 1735.41,1718.7 1761.81,1718.7 1765.55,1722.44 v1(1858.77,1722.44)
BOOT1: R3.1 U3.20 | length 1840.8
  Top Layer w10: v1(1112.2,2244.09) 1131.89,2224.41 U3.20@1131.89,2097.25 ; v1(1545.67,2096.46) 1547.05,2095.07 1699.37,2247.4 v1(1776.56,2247.4) ; v1(1905.98,1722.44) 1995.57,1722.44 2051.63,1666.38 R3.1@2086.62,1666.38
  Bottom Layer w10: v1(1112.2,2244.09) 1278.56,2244.09 1426.2,2096.46 v1(1545.67,2096.46) ; v1(1776.56,2247.4) 1776.56,2245.16 1759.87,2245.16 1692.91,2178.2 1692.91,2066.93 1791.51,1968.33 1791.51,1836.91 1791.51,1776.96 1819.03,1749.44 1869.95,1749.44 1896.95,1722.44 v1(1905.98,1722.44)
BUTTON1: C21.2 J3.7 R14.2 R16.1 U3.42 | length 3788.2
  Top Layer w10: U3.42@1151.57,1732.28 1151.57,1644.72 1259.65,1536.65 1358.46,1536.65 1397.83,1576.02 1456.89,1576.02 1476.58,1595.7 1575,1595.7 1596,1616.7 1611.56,1616.7 1646.12,1651.26 1646.12,1700.14 1611.56,1734.7 1528.01,1734.7 1477.28,1683.97 v1(1477.28,1675.7)
  Bottom Layer w10: v1(1477.28,1675.7) 1484.28,1675.7 1484.28,1686.88 1500.09,1702.7 1515.12,1702.7 1531.12,1718.7 1538.65,1718.7 1554.65,1734.7 1569.71,1734.7 1625.23,1790.22 1625.23,2205.98 1755.1,2335.85 J3.7@1755.1,2468.35 1828.61,2541.86 1889.31,2541.86 2064.44,2541.86 2074.28,2541.86 2140.29,2541.86 2172.29,2509.86 2182.15,2500 2196.61,2485.54 2213.59,2468.56 2213.59,2422.24 2237.94,2397.89 2408.2,2397.89 2565.21,2240.88 2565.21,2100.14 2565.21,2050.46 2565.21,1777.81 2484.45,1697.05 C21.2@2371.72,1697.05 2371.72,1663.06 R14.2@2303.15,1594.49 ; R14.2@2298.54,1589.61 2298.54,1490.83 R16.1@2303.15,1486.22
BUTTON2: C23.2 J3.6 R18.2 R19.1 U3.43 | length 3243.7
  Top Layer w10: U3.43@1171.26,1732.28 1171.26,1647.66 1266.27,1552.65 1351.84,1552.65 1391.21,1592.02 1450.26,1592.02 1469.95,1611.7 1568.37,1611.7 1589.37,1632.7 1604.93,1632.7 1630.12,1657.89 1630.12,1693.51 1604.93,1718.7 1550.09,1718.7 1515.75,1684.36 v1@1515.75,1673.23
  Bottom Layer w10: v1(1511.28,1675.7) 1521.93,1686.36 1521.93,1686.88 1535.43,1700.38 ; 1536.62,1701.57 1537.75,1702.7 1545.28,1702.7 1561.28,1718.7 1576.34,1718.7 1585.71,1728.07 1641.23,1783.59 1641.23,2199.36 1771.1,2329.23 1855.1,2413.23 J3.6@1855.1,2468.35 1855.1,2485.02 1895.94,2525.86 2078.92,2525.86 2112.61,2492.17 2112.61,2474.01 2113.59,2473.03 2113.59,2451.15 2137.9,2426.83 2182.85,2381.89 2269.88,2381.89 2348.62,2381.89 2401.57,2381.89 2549.21,2234.25 2549.21,2057.09 2519.69,2027.56 2385.22,2027.56 C23.2@2372.11,2014.45 2303.99,1946.33 R18.2@2303.99,1907.01 ; R19.1@2302.15,1804.49 2302.15,1908.45 R18.2@2303.15,1909.45
BUTTON3: C22.2 J3.5 R15.2 R17.1 U3.45 | length 2434.9
  Top Layer w10: U3.45@1210.63,1751.97 1210.63,1630.92 1272.9,1568.65 1345.21,1568.65 1384.58,1608.02 1443.64,1608.02 1463.32,1627.7 1561.75,1627.7 1582.75,1648.7 1598.3,1648.7 1614.12,1664.52 1614.12,1686.88 1598.3,1702.7 1575.93,1702.7 v1(1548.93,1675.7)
  Bottom Layer w10: v1(1548.93,1675.7) 1575.93,1702.7 1582.97,1702.7 1601.71,1721.45 1657.23,1776.96 1657.23,2192.73 1787.1,2322.6 1932.85,2468.35 J3.5@1955.1,2468.35 1971.52,2484.77 1972.96,2484.77 1998.05,2509.86 2072.29,2509.86 2096.61,2485.54 2096.61,2391.58 2263.78,2224.41 R15.2@2299.06,2224.41 2299.06,2249.84 C22.2@2372.05,2322.83 ; R17.1@2299.06,2121.89 R15.2@2299.06,2220.32
ENA: R8.2 U5.6 | length 2144.6
  Top Layer w10: R8.2@1358.27,1289.37 v1(1397.64,1289.37)
  Bottom Layer w10: U5.6@1307.48,285.43 1289.37,285.43 1131.89,442.91 1112.2,442.91 1033.46,442.91 1023.62,452.76 1007.48,468.9 1007.48,1167.72 915.35,1259.84 915.35,1437.01 1013.78,1535.43 1318.9,1535.43 1397.64,1456.69 v1(1397.64,1289.37)
ENB: R9.1 U5.11 | length 1487.3
  Top Layer w10: v1(1318.9,1444.19) 1350.06,1444.19 1358.27,1435.98 R9.1@1358.27,1416.3
  Bottom Layer w10: U5.11@1057.48,485.43 1057.48,1171.67 970.01,1259.14 945.69,1283.46 945.69,1427.97 1023.62,1505.91 1220.47,1505.91 1285.67,1440.71 1318.9,1440.71 v1(1318.9,1444.19)
encoder_phase_A: J2.8 J6.1 U3.13 | length 3978.9
  Top Layer w10: U3.13@1269.68,2086.61 1269.68,2194.88 1446.85,2372.05 1642.73,2372.05 1696.6,2425.92 1696.6,2451.14 1696.61,2485.54 1696.6,2496.32 1652.76,2540.16 J2.8@1652.76,2627.95
  Top Layer w20: J6.1@168.62,1279.53 J6.1@452.76,1279.53
  Bottom Layer w10: J6.1@168.62,1279.53 88.58,1359.57 88.58,1948.06 193.91,2053.39 193.91,2528.1 239.67,2573.86 498.8,2573.86 511.38,2573.84 717.47,2573.86 1629.55,2573.86 1652.76,2597.07 J2.8@1652.76,2627.95
encoder_phase_B: J2.9 J6.2 U3.14 | length 4110.7
  Top Layer w10: U3.14@1250,2086.61 1250,2204.72 1437.01,2391.73 1555.12,2391.73 1604.33,2440.94 1604.33,2509.84 1552.76,2561.42 J2.9@1552.76,2627.95
  Top Layer w20: J6.2@168.62,1082.68 J6.2@462.6,1082.68
  Bottom Layer w10: J6.2@168.62,1082.68 59.06,1192.24 59.06,2108.73 61.68,2111.35 61.68,2113.68 100.41,2152.41 102.73,2152.41 166.77,2216.44 166.77,2542.91 330.55,2706.69 1438.9,2706.69 1517.64,2627.95 J2.9@1552.76,2627.95